# EAGLE board schematic (EAGLE 8.7.1)
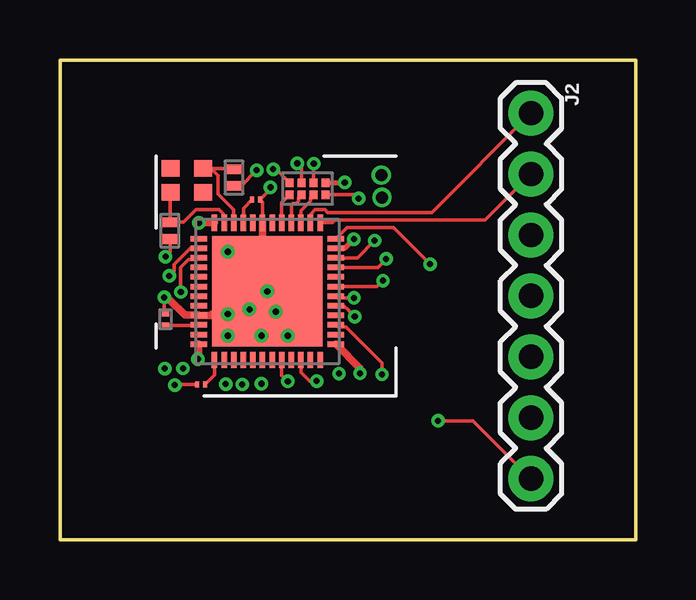
[diagram p0: board, top side]
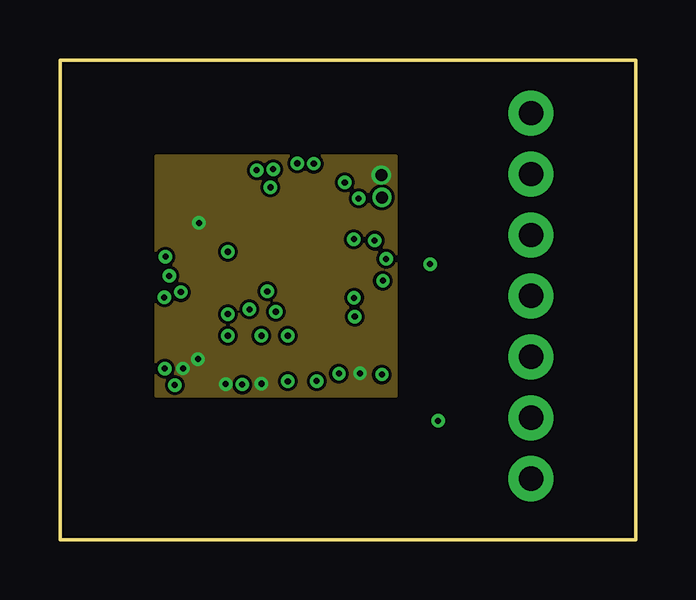
[diagram p1: board, inner layer Route8]
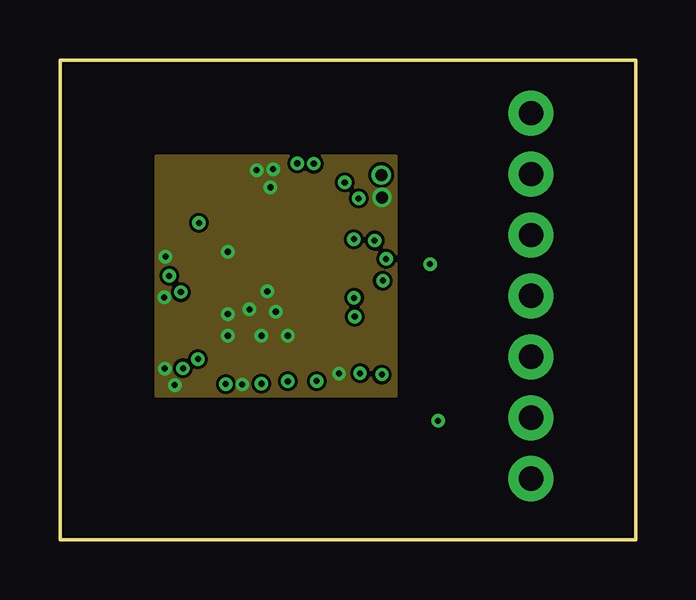
[diagram p2: board, inner layer Route10]
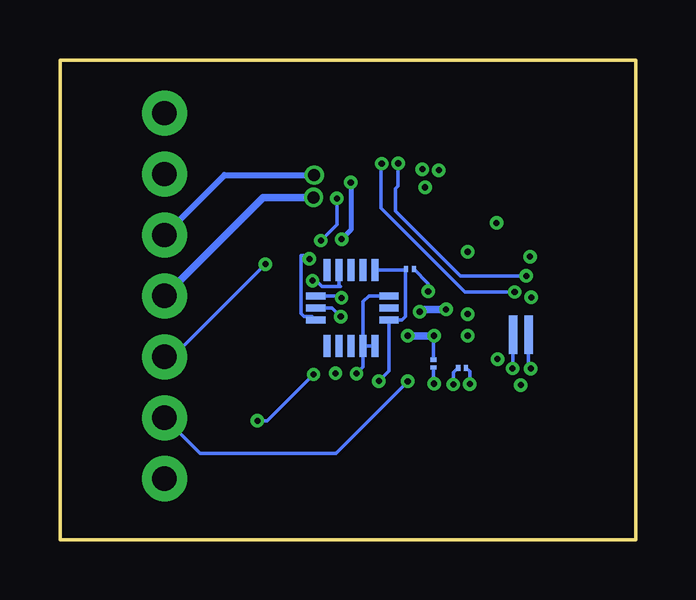
[diagram p3: board, bottom side, seen from below]

Size 24 x 20 mm. Coordinates in mm from the lower left corner, seen from the top.
Outline: 0,0 24,0 24,20 0,20 0,0
Copper layers (1*8*10*16): Top 0.035mm / dielectric 0.42mm / Route8 0.035mm / dielectric 0.62mm / Route10 0.035mm / dielectric 0.42mm / Bottom 0.035mm
Design rules "default *": minimum track width 6mil, minimum drill 10mil, track to track 5mil, track to pad 5mil, pad to pad 5mil, via to via 5mil, smd to smd 2mil, copper to edge 40mil, drill to drill 6mil, minimum pad ring 10mil, minimum via ring 6mil, stop-mask expansion 4mil, vias tented up to drill 0mil, thermal gap 10mil

## Footprints (pad centres in the part's own frame; a part is rotated, then mirrored left to right if it is on the bottom)
CAP_0402-L = smd 0.178 x 0.254: 1 -0.152,0; 2 0.178,0
CAPC1005X55N = smd 0.4 x 0.6: 1 -0.4,0; 2 0.3,0
CAPC0502X28N = smd 0.25 x 0.3: 1 -0.3,0; 2 0.2,0
4P7UFCAPACITOR = smd 0.35 x 1.6: 1 -0.4,0.1; 2 0.25,0.1
1X07 = drill 1.016 pad 1.88: 1 0,0; 2 2.54,0; 3 5.08,0; 4 7.62,0; 5 10.16,0; 6 12.7,0; 7 15.24,0
QFN48-6X6MM = smd 0.68 x 0.23: 1 -2.86,2.2; 2 -2.86,1.8; 3 -2.86,1.4; 4 -2.86,1; 5 -2.86,0.6; 6 -2.86,0.2; 7 -2.86,-0.2; 8 -2.86,-0.6; 9 -2.86,-1; 10 -2.86,-1.4; 11 -2.86,-1.8; 12 -2.86,-2.2; 25 2.86,-2.2; 26 2.86,-1.8; 27 2.86,-1.4; 28 2.86,-1; 29 2.86,-0.6; 30 2.86,-0.2; 31 2.86,0.2; 32 2.86,0.6; 33 2.86,1; 34 2.86,1.4; 35 2.86,1.8; 36 2.86,2.2 | smd 0.23 x 0.68: 13 -2.2,-2.86; 14 -1.8,-2.86; 15 -1.4,-2.86; 16 -1,-2.86; 17 -0.6,-2.86; 18 -0.2,-2.86; 19 0.2,-2.86; 20 0.6,-2.86; 21 1,-2.86; 22 1.4,-2.86; 23 1.8,-2.86; 24 2.2,-2.86; 37 2.2,2.86; 38 1.8,2.86; 39 1.4,2.86; 40 1,2.86; 41 0.6,2.86; 42 0.2,2.86; 43 -0.2,2.86; 44 -0.6,2.86; 45 -1,2.86; 46 -1.4,2.86; 47 -1.8,2.86; 48 -2.2,2.86 | smd 4.6 x 4.6: EP 0,0
TFLGA-16/3.3MMX3.1MM = smd 0.3 x 0.8: CS 0.5,-1.475; GND@3 -0.5,1.575; MISO 0,-1.475; MOSI -0.5,-1.475; NC@2 0,1.575; VS 0.5,1.575 | smd 0.925 x 0.3: GND@1 1.587,0.5; GND@2 1.587,1; INT1 1.587,0; INT2 1.587,-1; NC@1 -1.587,0.5; RESERVED@1 -1.587,0; RESERVED@2 -1.587,-1; RESERVED@3 1.587,-0.5; SCLK -1.587,-0.5; VDD/IO -1.587,1
AT25SF161-UUD-T = smd 0.35 x 0.35: 1 1.2,0.9; 2 1.2,0.4; 3 1.2,-0.1; 4 1.2,-0.6; 5 0.7,0.9; 6 0.7,0.4; 7 0.7,-0.1; 8 0.7,-0.6
32MHZCRYSTAL = smd 0.75 x 0.7: 1 0.485,0.47; 2 1.835,0.47; 3 1.835,1.47; 4 0.485,1.47

## Placement (x,y rotation side)
C1  C0402X5R0G104M020BCCAP_0402-L  [CAP_0402-L]  9.39,11.28 180 bottom
C2  C0402X5R0G104M020BCCAP_0402-L  [CAP_0402-L]  5.9,6.46 180 top
C3  C0402X5R0G104M020BCCAP_0402-L  [CAP_0402-L]  8.43,7.35 270 bottom
C4  C0402X5R0G104M020BCCAP_0402-L  [CAP_0402-L]  7.25,7.16 0 bottom
C5  C0402C0G1C101J020BCCAP_0402-L  [CAP_0402-L]  8.16,14.18 0 top
C6  GRM1555C1H6R0CA01D  [CAPC1005X55N]  4.59,12.93 90 top
C7  GRM1555C1H6R0CA01D  [CAPC1005X55N]  7.26,15.14 90 top
C8  GRMMDXR60J105ME05D  [CAPC0502X28N]  4.4,9.23 90 top
C9  4P7UFCAPACITOR4P7UFCAPACITOR  [4P7UFCAPACITOR]  4.86,8.64 180 bottom
J2  header  [1X07]  19.64,17.78 270 top
U1  NRF52832  [QFN48-6X6MM]  8.65,10.35 90 top
U$1  ADXL362  [TFLGA-16/3.3MMX3.1MM]  11.86,9.66 270 bottom
U$3  AT25SF161-UUD-T  [AT25SF161-UUD-T]  10.17,15.58 270 top
U$6  32MHZCRYSTAL  [32MHZCRYSTAL]  6.45,15.95 180 top

## Library data of the parts
C1-C4 = 0p1_uF_capacitor; MANUFACTURER_PART_NUMBER: C0402C0G1C101J020BC; VENDOR: TDK
C5 = 100_pF_capacitor; MANUFACTURER_PART_NUMBER: C0402C0G1C101J020BC; VENDOR: TDK
C6 C7 = 6pf_capacitor_new-bigger; DESCRIPTION: 0402 6 pF 50 V ±0.25 pF Tolerance C0G SMT Multilayer Ceramic Capacitor; DIGI-KEY_PART_NUMBER: 490-8222-1-ND; DIGI-KEY_PURCHASE_URL: https://www.digikey.com/product-detail/en/murata-electronics-north-america/GRM1555C1H6R0CA01D/490-8222-1-ND/4380516?WT.z_cid=ref_snapeda&utm_source=snapeda&utm_medium=aggregator&utm_campaign=buynow; MF: Murata; MP: GRM1555C1H6R0CA01D; PACKAGE: 0402 Murata
C8 = 1UFCAPACITOR; DESCRIPTION: Cap, Mlcc, X5r, 1uf, 6.3v, 015008; DIGI-KEY_PART_NUMBER: 490-13424-1-ND; DIGI-KEY_PURCHASE_URL: https://www.digikey.com/product-detail/en/murata-electronics-north-america/GRMMDXR60J105ME05D/490-13424-1-ND/6023636?WT.z_cid=ref_snapeda&utm_source=snapeda&utm_medium=aggregator&utm_campaign=buynow; MF: Murata; MP: GRMMDXR60J105ME05D; PACKAGE: 015008 Murata
C9 = 4p7_uF_capacitor; MANUFACTURER_PART_NUMBER: C0816X5R0J475M050AC; VENDOR: TDK
J2 = SparkFun-Connectors
U1 = nrf52832-breakout-temp; PROD_ID: IC-13460
U$1 = ADXL362
U$3 = AT25SF161-UUD-T
U$6 = 32_mhz_crystal

## Nets
ADXL_POWER-QFAA: C1.2 U1.10 U$1.VDD/IO U$1.VS
CS-QFAA: U1.21 U$1.CS
CS_FLASH: U1.23 U$3.5
DEC1-QFAA: C2.1 U1.1
DEC3-QFAA: C5.1 U1.33
DEC4-QFAA: C8.1 U1.46
FLASH_POWER: U1.22 U$3.1
GND: C1.1 C2.2 C3.1 C4.1 C5.2 C6.1 C7.1 C8.2 C9.1 J2.4 U1.31 U1.45 U1.EP U$1.GND@1 U$1.GND@2 U$1.GND@3 U$3.8
HOLD_FLASH: U1.27 U$3.2
MISO-QFAA: U1.17 U$1.MISO
MOSI-QFAA: U1.18 U$1.MOSI
P0.06-QFAA: J2.6 U1.8
P0.12-QFAA: J2.7 U1.15
RESET-QFAA: J2.5 U1.24
SCK_FLASH: U1.28 U$3.3
SCLK-QFAA: U1.19 U$1.SCLK
SI_FLASH: U1.29 U$3.4
SO_FLASH: U1.39 U$3.6
SWDCLK-QFAA: J2.2 U1.25
SWDIO-QFAA: J2.1 U1.26
VDD: C3.2 C4.2 C9.2 J2.3 U1.13 U1.36 U1.48
WP_FLASH: U1.38 U$3.7
XC1-QFAA: C7.2 U1.34 U$6.1
XC2-QFAA: C6.2 U1.35 U$6.3

## Tracks (layer width: path | path; a pad name or v marks a point on that pad's centre or on a via)
ADXL_POWER-QFAA  (via drill 0.25)
  Top 0.152: U1.10 10.05,6.96 10.4,6.61 v10.71,6.61
  Bottom 0.152: U$1.VS 10.28,7.03 v10.71,6.61 | U$1.VS 10.33,9.2 10.54,9.2 | U$1.VDD/IO 9.61,11.24 C1.2 9.59,11.27 9.59,9.3 9.73,9.16 U$1.VS
CS-QFAA  (via drill 0.25)
  Top 0.152: v13.6,11.7 13.25,11.35 U1.21
  Bottom 0.152: U$1.CS 13.48,9.3 13.82,9.3 13.95,9.44 13.95,11.84 13.73,11.84 v13.6,11.7
CS_FLASH  (via drill 0.25)
  Top 0.203: U$3.5 v11.86,14.88 v11.87,14.89 | v12.25,12.53 12.07,12.35 12.07,12.34 11.88,12.15 U1.23
  Bottom 0.203: v11.87,14.89 11.87,12.91 v12.25,12.53
DEC1-QFAA
  Top 0.152: U1.1 6.45,6.86 C2.1
DEC3-QFAA
  Top 0.152: U1.33 7.65,13.81 C5.1
DEC4-QFAA
  Top 0.152: C8.1 5.77,8.93 U1.46
FLASH_POWER  (via drill 0.25)
  Top 0.152: U1.22 12.4,11.75 v13.12,12.47 | v12.45,14.23 12.3,14.38 U$3.1
  Bottom 0.152: v13.12,12.47 12.45,13.14 v12.45,14.23
GND  (via drill 0.25, 0.25 pad 0.46, 0.5)
  Top 0.152: U$3.8 9.01,15.45 v8.89,15.45 | C2.2 4.81,6.46 v4.79,6.44 | C8.2 4.35,9.48 4.35,10 v4.35,10.1 | C6.1 4.59,11.99 v4.4,11.8 | C7.1 7.54,14.74 v8.2,15.4 | v8.78,14.69 8.78,14.61 C5.2 8.45,14.07 U1.31
  Top 0.305: v8.4,8.5 7.5,9.4 v7,9.4 | v7,9.4 6.35,9.4 6.3,9.35 U1.45 5.22,9.36 4.57,10 4.35,10 | 8.45,12.5 8.45,12.15 | 8.45,12.15 8.4,12.1 | U1.31 8.45,12.5 | 8.45,12.15 8.45,10.55 U1.EP | v7,8.5 7,8.7 v7.9,9.6 U1.EP | U1.EP 7.95,10.35 v7,9.4 | 8.45,12.5 7.5,12.5 v7,12
  Bottom 0.152: U$1.GND@2 U$1.GND@1 | U$1.GND@1 11.36,9.92 11.12,10.16 U$1.GND@3 | C9.1 4.46,7.22 v4.37,7.13 | C3.1 8.43,8.47 v8.4,8.5 | U$1.GND@1 11.36,7.2 v11.63,6.92 | C1.1 8.65,10.69 U1.EP | C4.1 7.6,6.96 v7.6,6.47
  Bottom 0.305: J2.4 15.53,14.27 v13.43,14.27 | v8.4,8.5 v9.5,8.5 | v7.9,9.6 8.9,9.6 v9,9.5
  other vias: 8.65,10.35
  pour Route10: 4,16 4,6 14,6 14,16
HOLD_FLASH
  Top 0.152: U$3.2 10.45,14.26 10.45,14.12 10.05,13.71 U1.27
MISO-QFAA  (via drill 0.25 pad 0.46)
  Top 0.152: v12.29,9.3 12.05,9.54 12.05,9.55 11.85,9.75 U1.17
  Bottom 0.152: v12.29,9.3 12.65,9.66 U$1.MISO
MOSI-QFAA  (via drill 0.25 pad 0.46)
  Top 0.152: U1.18 11.58,10.07 v12.26,10.07
  Bottom 0.152: v12.26,10.07 12.34,10.16 U$1.MOSI
P0.06-QFAA  (via drill 0.25 pad 0.46)
  Top 0.152: U1.8 9.25,6.85 v9.5,6.6
  Bottom 0.152: v9.5,6.6 12.5,3.6 18.16,3.6 J2.6
P0.12-QFAA  (via drill 0.25)
  Top 0.152: U1.15 11.59,8.87 11.93,8.87 13.43,7.37 v13.43,6.88 | v15.76,4.95 17.23,4.95 J2.7
  Bottom 0.152: v13.43,6.88 15.36,4.95 v15.76,4.95
RESET-QFAA  (via drill 0.25)
  Top 0.152: U1.24 11.97,13.01 13.91,13.01 v15.43,11.49
  Bottom 0.152: v15.43,11.49 19.3,7.62 J2.5
SCK_FLASH
  Top 0.152: U1.28 9.65,13.95 9.7,14 9.83,14 9.95,14.12 9.95,14.26 U$3.3
SCLK-QFAA  (via drill 0.25)
  Top 0.152: v13.47,10.8 13.22,10.55 12.47,10.55 12.46,10.56 12.06,10.56 12.05,10.55 U1.19
  Bottom 0.152: v13.47,10.8 13.31,10.8 13.07,10.56 12.3,10.56 12.36,10.62 U$1.SCLK
SI_FLASH
  Top 0.152: U1.29 9.25,14.05 U$3.4
SO_FLASH  (via drill 0.25 pad 0.46)
  Top 0.152: U1.39 5.7,11.67 5.36,11.67 5.04,11.35 v5.04,10.32 | v10.58,15.68 10.57,15.67 U$3.6
  Bottom 0.152: v5.04,10.32 7.11,10.32 10.62,13.83 10.62,15.64 v10.58,15.68
SWDCLK-QFAA
  Top 0.152: U1.25 11.36,13.21 11.47,13.32 17.71,13.32 J2.2
SWDIO-QFAA
  Top 0.152: U1.26 10.45,13.56 10.64,13.75 11.04,13.75 11.16,13.64 15.5,13.64 J2.1
VDD  (via drill 0.25, 0.5 pad 0.46)
  Top 0.305: U1.48 5.79,7.56 v5.75,7.53 | U1.36 v5.81,13.21 v5.8,13.2 | U1.13 12.51,7.14 v12.51,6.93
  Bottom 0.152: C9.2 5.11,7.16 v5.13,7.14 | C3.2 8.43,6.53 v8.4,6.5 | C4.2 6.91,7.01 v6.91,6.49
  Bottom 0.254: J2.3 17.14,15.2 v13.4,15.2
  pour Route8: 4,16 14,16 14,6 4,6
WP_FLASH  (via drill 0.25 pad 0.46)
  Top 0.152: v4.56,11 4.76,11.2 4.76,11.47 5.44,12.15 U1.38 | v9.9,15.69 10.07,15.51 U$3.7
  Bottom 0.152: v4.56,11 7.3,11 10,13.7 10,14.64 9.9,14.75 v9.9,15.69
XC1-QFAA
  Top 0.152: U$6.1 6.3,15.48 | 6.3,15.48 7.23,15.48 C7.2 | U1.34 7.25,13.75 6.6,14.4 6.6,15.18 6.3,15.48
XC2-QFAA
  Top 0.152: U$6.3 4.59,14.45 C6.2 5.15,13.23 5.67,13.75 6.64,13.75 6.8,13.6 6.8,13.25 U1.35